# EAGLE board driver_piezo_pan (EAGLE 7.1.0)
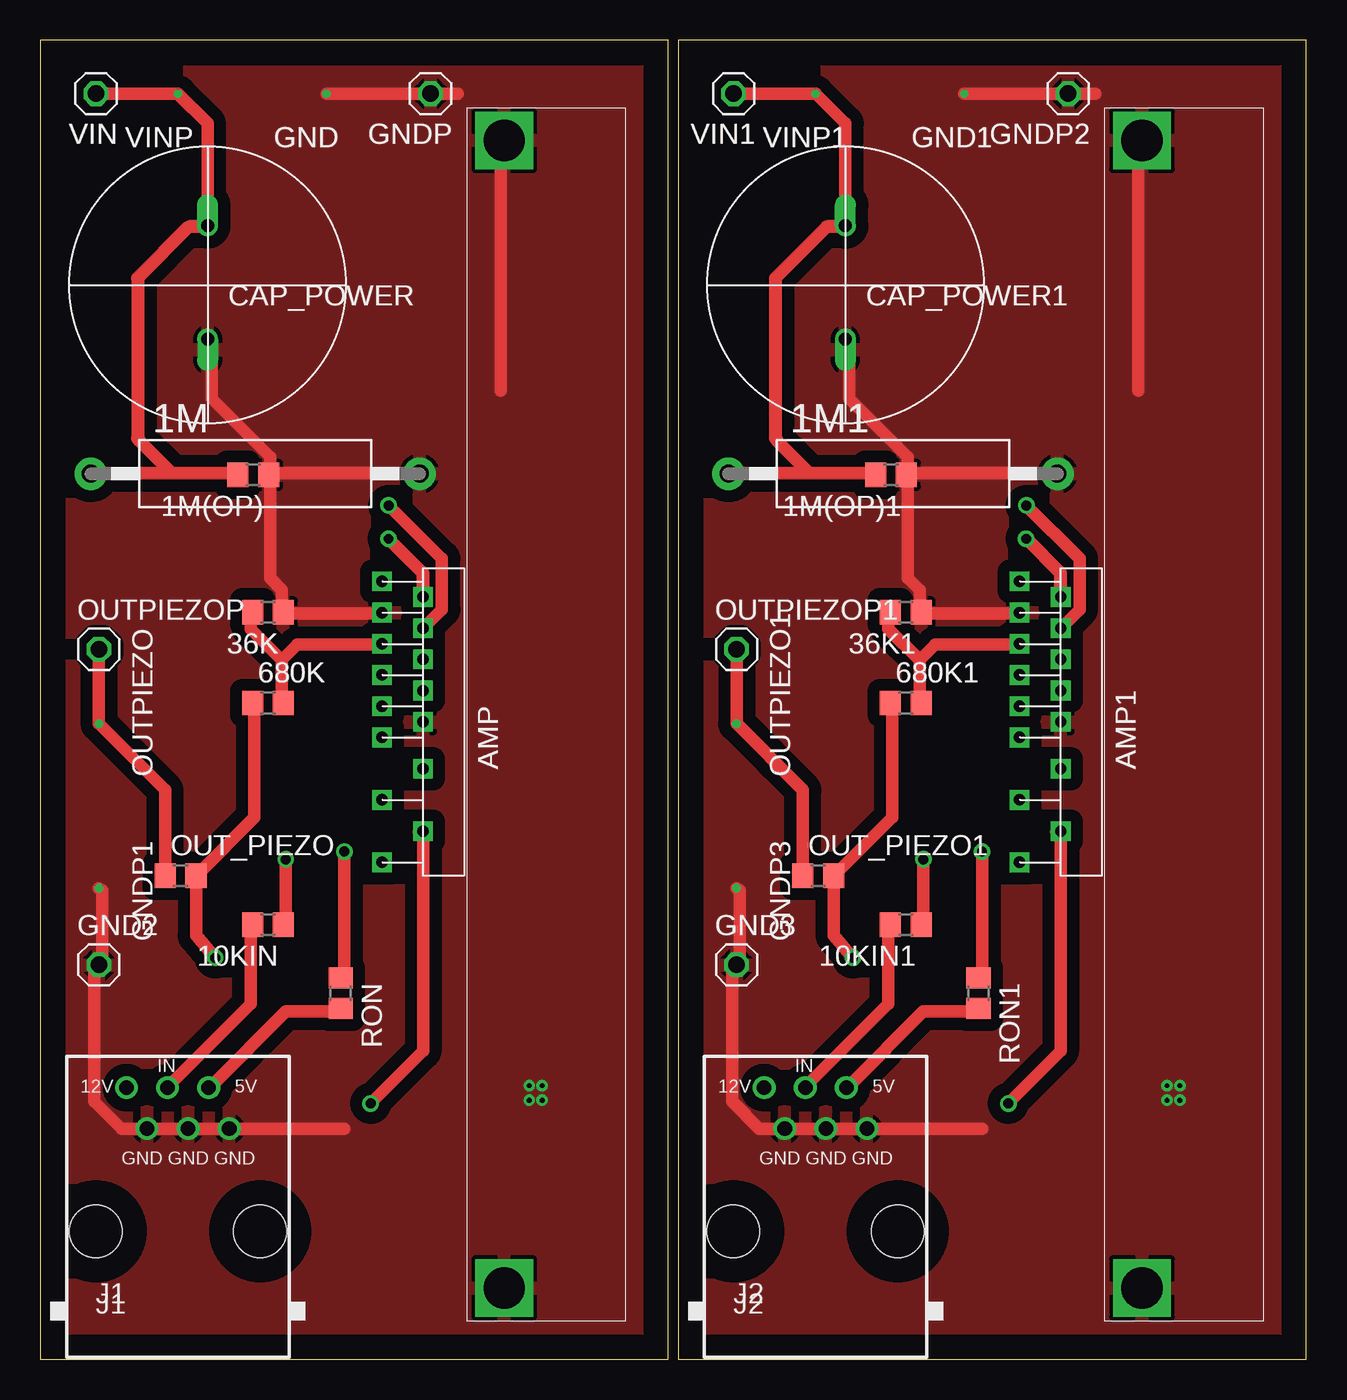
[diagram p0: board, top side]
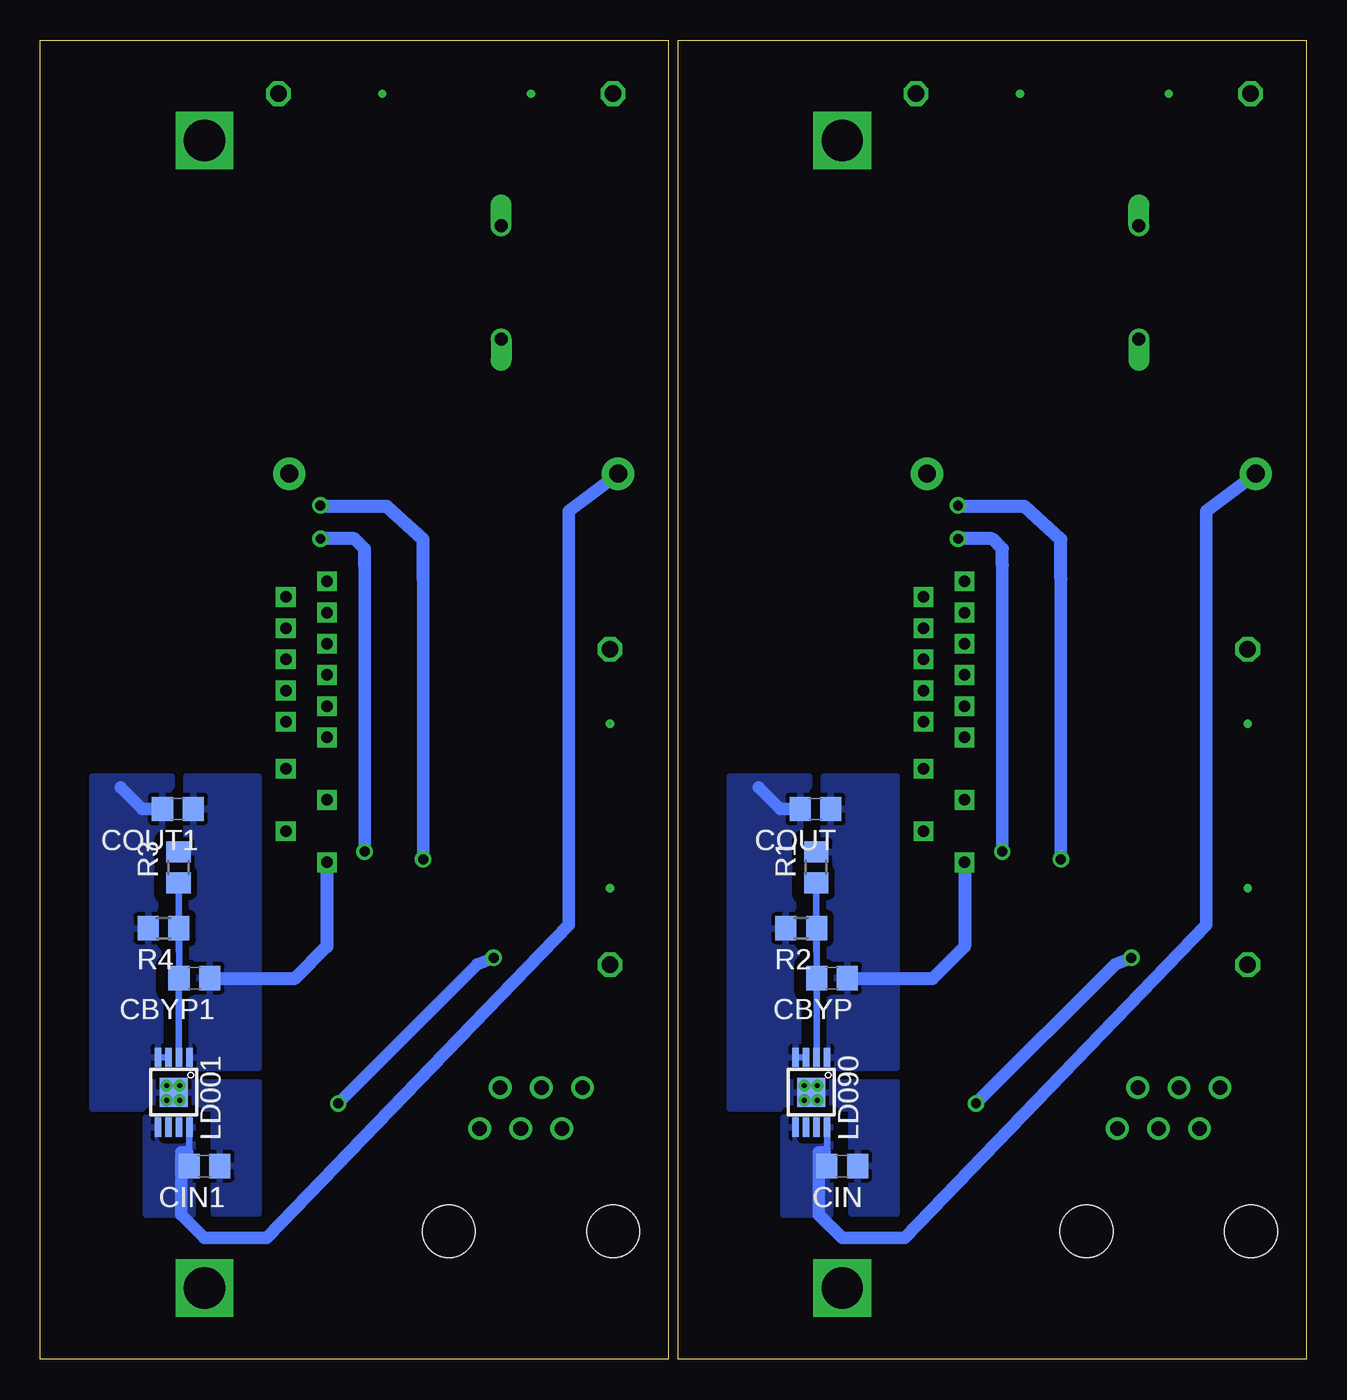
[diagram p1: board, bottom side, seen from below]

Size 78.2 x 81.5 mm. Coordinates in mm from the lower left corner, seen from the top.
Outline: 0,0 38.8,0 38.8,81.5 0,81.5 0,0
Outline: 39.4,0 78.2,0 78.2,81.5 39.4,81.5 39.4,0
Copper layers (1*16): Top 0.035mm / dielectric 1.5mm / Bottom 0.035mm
Design rules "default *": minimum track width 30mil, minimum drill 24mil, track to track 8mil, track to pad 8mil, pad to pad 8mil, via to via 8mil, smd to smd 8mil, copper to edge 60mil, drill to drill 8mil, minimum pad ring 10mil, minimum via ring 8mil, stop-mask expansion 4mil, vias tented up to drill 0mil, thermal gap 10mil
Net classes: 1 PWR: width 0.127 mm, clearance 0.406 mm; 2 GND: width 0.127 mm, clearance 0.762 mm; 3 VIN: width 0.127 mm, clearance 0.406 mm; 4 5V: width 0.406 mm, clearance 0.61 mm

## Footprints (pad centres in the part's own frame; a part is rotated, then mirrored left to right if it is on the bottom)
CA0002 = drill 1.1 pad 2: 1 -10.16,0; 2 10.16,0
R0805 = smd 1.3 x 1.5: 1 -0.95,0; 2 0.95,0
POWER_AMP_LME49811TB = drill 0.71 square: -VEE -1.351,-0.455; COMP -1.351,3.405; GND -3.891,6.3; IN+ -1.351,5.335; IN- -3.891,4.37; NC -1.351,-3.35; NC1 -3.891,-1.42; NC2 -3.891,0.51; NC3 -1.351,1.475; NC4 -3.891,2.44; NC5 -3.891,8.23; SD -1.351,7.265; SINK -3.891,-5.28; SOURCE -1.351,-7.21; VCC -3.891,-9.14
CAP200V = drill 0.8 offset: + 0,3.65; - 0,-3.35
C0805 = smd 1.3 x 1.5: 1 -0.95,0; 2 0.95,0
PAD = drill 0.003: P$1 0,0
1X01 = drill 1.016 octagon: 1 0,0
RJ12-STRAIGHT-ANALOG = drill 0.9 pad 1.4: +5V 1.905,8.89; +12V -3.175,8.89; GND1 3.175,6.35; GND2 0.635,6.35; GND3 -1.905,6.35; IN -0.635,8.89 | hole 3.251: -5.08,0; 5.08,0
S-PDSO-G08 = smd 0.4 x 1.2: 1 -0.975,-2.157; 2 -0.325,-2.157; 3 0.325,-2.157; 4 0.975,-2.157; 5 0.975,2.157; 6 0.325,2.157; 7 -0.325,2.157; 8 -0.975,2.157 | smd 1.73 x 1.78: TH 0,0
DISIPADOR = drill 2.55 square: P$1 -3.22,-34.98; P$2 -3.22,35.95

## Placement (x,y rotation side)
1M  [CA0002]  13.27,54.72 0 top
1M1  [CA0002]  52.67,54.72 0 top
1M(OP)  [R0805]  13.15,54.65 180 top
1M(OP)1  [R0805]  52.55,54.65 180 top
10KIN  [R0805]  14.06,26.85 180 top
10KIN1  [R0805]  53.46,26.85 180 top
36K  [R0805]  14.06,46.15 180 top
36K1  [R0805]  53.46,46.15 180 top
680K  [R0805]  14.06,40.55 0 top
680K1  [R0805]  53.46,40.55 0 top
AMP  POWER_AMP_LME49811TB  [POWER_AMP_LME49811TB]  24.99,39.84 0 top
AMP1  POWER_AMP_LME49811TB  [POWER_AMP_LME49811TB]  64.39,39.84 0 top
CAP_POWER  CAP200VCAP200V  [CAP200V]  10.33,66.39 0 top
CAP_POWER1  CAP200VCAP200V  [CAP200V]  49.73,66.39 0 top
CBYP  [C0805]  29.29,23.55 180 bottom
CBYP1  [C0805]  68.69,23.55 180 bottom
CIN  [C0805]  28.66,11.93 180 bottom
CIN1  [C0805]  68.06,11.93 180 bottom
COUT  [C0805]  30.31,34 180 bottom
COUT1  [C0805]  69.71,34 180 bottom
GND  PAD  [PAD]  17.68,78.21 0 top
GND1  PAD  [PAD]  57.08,78.21 0 top
GND2  [1X01]  3.61,24.37 0 top
GND3  [1X01]  43.01,24.37 0 top
GNDP  [1X01]  24.1,78.21 180 top
GNDP1  PAD  [PAD]  3.61,29.1 90 top
GNDP2  [1X01]  63.5,78.21 180 top
GNDP3  PAD  [PAD]  43.01,29.1 90 top
J1  RJ12STRAIGHT-ANALOG  [RJ12-STRAIGHT-ANALOG]  8.49,7.89 0 top
J2  RJ12STRAIGHT-ANALOG  [RJ12-STRAIGHT-ANALOG]  47.89,7.89 0 top
LD001  TPS7A4001  [S-PDSO-G08]  69.97,16.49 180 bottom
LD090  TPS7A4001  [S-PDSO-G08]  30.57,16.49 180 bottom
OUT_PIEZO  [R0805]  8.66,29.87 0 top
OUT_PIEZO1  [R0805]  48.06,29.87 0 top
OUTPIEZO  PAD  [PAD]  3.61,39.27 90 top
OUTPIEZO1  PAD  [PAD]  43.01,39.27 90 top
OUTPIEZOP  [1X01]  3.61,43.87 0 top
OUTPIEZOP1  [1X01]  43.01,43.87 0 top
R1  [R0805]  30.27,30.38 90 bottom
R2  [R0805]  31.2,26.63 180 bottom
R3  [R0805]  69.67,30.38 90 bottom
R4  [R0805]  70.6,26.63 180 bottom
RON  [R0805]  18.55,22.61 270 top
RON1  [R0805]  57.95,22.61 270 top
U$1  DISIPADOR  [DISIPADOR]  31.88,39.37 0 top
U$2  DISIPADOR  [DISIPADOR]  71.28,39.37 0 top
VIN  [1X01]  3.43,78.21 180 top
VIN1  [1X01]  42.83,78.21 180 top
VINP  PAD  [PAD]  8.49,78.21 0 top
VINP1  PAD  [PAD]  47.89,78.21 0 top

## Library data of the parts
1M 1M1 = resistor-power; OC_FARNELL: unknown; OC_NEWARK: unknown
1M(OP) 1M(OP)1 10KIN 10KIN1 36K 36K1 680K 680K1 CBYP CBYP1 CIN CIN1 COUT COUT1 OUT_PIEZO OUT_PIEZO1 R1-R4 RON RON1 = sym
AMP AMP1 CAP_POWER CAP_POWER1 GND GND1 GNDP1 GNDP3 LD001 LD090 OUTPIEZO OUTPIEZO1 U$1 U$2 VINP VINP1 = PIEZO_LBR
GND2 GND3 GNDP GNDP2 OUTPIEZOP OUTPIEZOP1 VIN VIN1 = pinhead
J1 J2 = lpatiny

## Nets
5V [5V]: J1.+5V RON.2
5V1 [5V]: J2.+5V RON1.2
B: 36K.2 680K.2 AMP.IN-
B1: 36K1.2 680K1.2 AMP1.IN-
FB: CBYP.2 LD090.2 R1.1 R2.1
FB1: CBYP1.2 LD001.2 R3.1 R4.1
GND [GND]: 1M(OP).1 1M.2 36K.1 AMP.-VEE AMP.GND CAP_POWER.- CIN.1 COUT.2 GND2.1 GND.P$1 GNDP1.P$1 GNDP.1 J1.GND1 J1.GND2 J1.GND3 LD090.3 LD090.4 LD090.TH R2.2 U$1.P$1 U$1.P$2
GND1 [GND]: 1M1.2 1M(OP)1.1 36K1.1 AMP1.-VEE AMP1.GND CAP_POWER1.- CIN1.1 COUT1.2 GND1.P$1 GND3.1 GNDP2.1 GNDP3.P$1 J2.GND1 J2.GND2 J2.GND3 LD001.3 LD001.4 LD001.TH R4.2 U$2.P$1 U$2.P$2
IN_AMP: 10KIN.1 AMP.IN+
IN_AMP1: 10KIN1.1 AMP1.IN+
IN_VOLTAGE: 10KIN.2 J1.IN
IN_VOLTAGE1: 10KIN1.2 J2.IN
ON: AMP.SD RON.1
ON1: AMP1.SD RON1.1
OUT_PIEZO: OUT_PIEZO.1 OUTPIEZO.P$1 OUTPIEZOP.1
OUT_PIEZO1: OUT_PIEZO1.1 OUTPIEZO1.P$1 OUTPIEZOP1.1
SOURCE: 680K.1 AMP.SOURCE OUT_PIEZO.2
SOURCE1: 680K1.1 AMP1.SOURCE OUT_PIEZO1.2
V1 [PWR]: AMP1.VCC CBYP1.1 COUT1.1 LD001.1 R3.2
V90 [PWR]: AMP.VCC CBYP.1 COUT.1 LD090.1 R1.2
VIN [VIN]: 1M(OP).2 1M.1 CAP_POWER.+ CIN.2 LD090.5 LD090.8 VIN.1 VINP.P$1
VIN1 [VIN]: 1M1.1 1M(OP)1.2 CAP_POWER1.+ CIN1.2 LD001.5 LD001.8 VIN1.1 VINP1.P$1

## Tracks (layer width: path | path; a pad name or v marks a point on that pad's centre or on a via)
5V
  Top 0.762: RON.2 18.53,21.48 15.15,21.48 10.57,16.89 J1.+5V
5V1
  Top 0.762: RON1.2 57.93,21.48 54.55,21.48 49.97,16.89 J2.+5V
B
  Top 0.762: 14.91,43.19 14.91,40.78 680K.2 | 14.91,43.19 12.98,45.12 12.98,46.09 36K.2 | 14.91,43.19 15.88,44.16 20.95,44.16 AMP.IN-
B1
  Top 0.762: 54.31,43.19 54.31,40.78 680K1.2 | 54.31,43.19 52.38,45.12 52.38,46.09 36K1.2 | 54.31,43.19 55.28,44.16 60.34,44.16 AMP1.IN-
FB
  Bottom 0.406: LD090.2 30.24,22.15 CBYP.2 30.24,25.23 R2.1 30.27,25.23 R1.1
FB1
  Bottom 0.406: LD001.2 69.65,22.15 CBYP1.2 69.64,25.23 R4.1 69.67,25.23 R3.1
GND  (via drill 0.3)
  Top 0.762: AMP.GND 20.95,46.09 15.15,46.09 36K.1 14.91,46.33 14.91,47.54 14.19,48.26 14.19,54.53 1M(OP).1 | CAP_POWER.- 10.57,62.98 10.57,59.36 14.19,55.74 14.19,55.02 1M(OP).1 | 1M(OP).1 14.73,54.77 23.66,54.77 1M.2 23.6,55.02 | 28.43,59.84 28.43,75.29 U$1.P$2 | GNDP1.P$1 3.81,28.96 3.81,24.37 GND2.1 3.33,24.13 3.33,15.93 5.02,14.24 6.23,14.24 J1.GND3 6.71,14.24 J1.GND2 9.36,14.24 11.54,14.24 J1.GND1 12.02,14.24 18.77,14.24 | GND.P$1 GNDP.1 25.77,78.21
  Bottom 0.406: LD090.3 LD090.4
  Bottom 0.762: 23.84,39.33 AMP.-VEE | 33.83,35.33 32.5,34 COUT.2
  other vias: 30.2,16.9 31,16.9 31,16 30.2,16
  pour Bottom: 30.7,18 30.7,36 35.6,36 35.6,18
  pour Bottom: 35.6,18 35.6,15.5 28.1,15.5 28.1,9 25.3,9 25.3,17.1 32.2,17.1 32.2,18
  pour Top: 1.4,79.8 1.4,0 37.4,0 37.4,80 1.4,80
GND1  (via drill 0.3)
  Top 0.762: AMP1.GND 60.34,46.09 54.55,46.09 36K1.1 54.31,46.33 54.31,47.54 53.59,48.26 53.59,54.53 1M(OP)1.1 | CAP_POWER1.- 49.97,62.98 49.97,59.36 53.59,55.74 53.59,55.02 1M(OP)1.1 | 1M(OP)1.1 54.13,54.77 63.06,54.77 1M1.2 63,55.02 | 67.83,59.84 67.83,75.29 U$2.P$2 | GNDP3.P$1 43.21,28.96 43.21,24.37 GND3.1 42.73,24.13 42.73,15.93 44.42,14.24 45.63,14.24 J2.GND3 46.11,14.24 J2.GND2 48.76,14.24 50.93,14.24 J2.GND1 51.42,14.24 58.17,14.24 | GND1.P$1 GNDP2.1 65.17,78.21
  Bottom 0.406: LD001.3 LD001.4
  Bottom 0.762: 63.24,39.33 AMP1.-VEE | 73.23,35.33 71.9,34 COUT1.2
  other vias: 69.6,16.9 70.4,16.9 70.4,16 69.6,16
  pour Bottom: 70.1,18 70.1,36 75,36 75,18
  pour Bottom: 75,18 75,15.5 67.5,15.5 67.5,9 64.7,9 64.7,17.1 71.6,17.1 71.6,18
  pour Top: 40.8,79.8 40.8,0 76.8,0 76.8,80 40.8,80
IN_AMP  (via drill 0.61)
  Top 0.762: v15.15,30.89 15.15,27.03 10KIN.1 | v21.51,52.76 24.81,49.47 24.81,46.33 23.84,45.36 AMP.IN+
  Bottom 0.762: 15.15,48.21 v15.15,30.89
  Bottom 0.813: 15.15,48.21 15.15,50.65 17.4,52.7 21.15,52.7 v21.51,52.76
IN_AMP1  (via drill 0.61)
  Top 0.762: v54.55,30.89 54.55,27.03 10KIN1.1 | v60.91,52.76 64.21,49.47 64.21,46.33 63.24,45.36 AMP1.IN+
  Bottom 0.762: 54.55,48.21 v54.55,30.89
  Bottom 0.813: 54.55,48.21 54.55,50.65 56.8,52.7 60.55,52.7 v60.91,52.76
IN_VOLTAGE
  Top 0.762: 10KIN.2 12.98,26.78 12.98,21.96 7.91,16.89 J1.IN
IN_VOLTAGE1
  Top 0.762: 10KIN1.2 52.38,26.78 52.38,21.96 47.31,16.89 J2.IN
ON  (via drill 0.61)
  Top 0.762: v18.77,31.37 18.77,23.65 RON.1
  Top 0.813: AMP.SD 23.64,48.56 v21.5,50.7
  Bottom 0.762: 18.77,49.07 v18.77,31.37
  Bottom 0.813: 18.77,49.07 18.77,50.07 19.4,50.7 v21.5,50.7
ON1  (via drill 0.61)
  Top 0.762: v58.17,31.37 58.17,23.65 RON1.1
  Top 0.813: AMP1.SD 63.04,48.56 v60.9,50.7
  Bottom 0.762: 58.17,49.07 v58.17,31.37
  Bottom 0.813: 58.17,49.07 58.17,50.07 58.8,50.7 v60.9,50.7
OUT_PIEZO
  Top 0.762: OUT_PIEZO.1 7.71,35.17 OUTPIEZO.P$1 OUTPIEZOP.1
OUT_PIEZO1
  Top 0.762: OUT_PIEZO1.1 47.11,35.17 OUTPIEZO1.P$1 OUTPIEZOP1.1
SOURCE  (via drill 0.61)
  Top 0.762: v20.4,15.8 23.64,19.04 AMP.SOURCE 23.36,32.58 | 680K.1 13.22,40.54 13.22,33.48 OUT_PIEZO.2 9.62,29.88 9.62,26.18 v10.8,24.8
  Bottom 0.762: v10.8,24.8 11.8,24.4 v20.4,15.8
SOURCE1  (via drill 0.61)
  Top 0.762: v59.8,15.8 63.04,19.04 AMP1.SOURCE 62.76,32.58 | 680K1.1 52.62,40.54 52.62,33.48 OUT_PIEZO1.2 49.02,29.88 49.02,26.18 v50.2,24.8
  Bottom 0.762: v50.2,24.8 51.2,24.4 v59.8,15.8
V1
  Bottom 0.813: AMP1.VCC 60.5,25.5 62.5,23.5 67.69,23.5 CBYP1.1
  pour Bottom: 69.2,18 69.2,36 64.7,36 64.7,18
V90
  Bottom 0.813: AMP.VCC 21.1,25.5 23.1,23.5 28.29,23.5 CBYP.1
  pour Bottom: 29.8,18 29.8,36 25.3,36 25.3,18
VIN
  Top 0.762: 1M(OP).2 12.02,54.77 8.1,54.77 3.33,54.77 1M.1 | 10.33,69.98 CAP_POWER.+ 10.33,76.37 VINP.P$1 VIN.1
  Top 0.813: 10.33,69.98 9.18,69.98 6,66.8 6,56.9 6.1,56.8 6.1,56.77 8.1,54.77
  Bottom 0.406: CIN.2 29.59,12.23 LD090.8
  Bottom 0.762: 29.73,12.79 30.11,12.79 30.11,8.93 28.67,7.48 24.81,7.48 6.16,26.83 6.16,52.4 3.33,54.53 1M.1
  pour Bottom: 29.4,14.9 29.4,8.9 32.3,8.9 32.3,14.9
VIN1
  Top 0.762: 1M(OP)1.2 51.42,54.77 47.5,54.77 42.73,54.77 1M1.1 | 49.73,69.98 CAP_POWER1.+ 49.73,76.37 VINP1.P$1 VIN1.1
  Top 0.813: 49.73,69.98 48.58,69.98 45.4,66.8 45.4,56.9 45.5,56.8 45.5,56.77 47.5,54.77
  Bottom 0.406: CIN1.2 69,12.23 LD001.8
  Bottom 0.762: 69.13,12.79 69.52,12.79 69.52,8.93 68.07,7.48 64.21,7.48 45.56,26.83 45.56,52.4 42.73,54.53 1M1.1
  pour Bottom: 68.8,14.9 68.8,8.9 71.7,8.9 71.7,14.9

## Text on the board
_tPlace: CAP_POWER | CAP_POWER1 | AMP | AMP1
_tNames: VIN | GNDP | VIN1 | GNDP2 | VINP | GND | VINP1 | GND1 | 1M | 1M1 | 1M(OP) | 1M(OP)1 | OUTPIEZOP | OUTPIEZOP1 | 36K | 36K1 | 680K | 680K1 | OUTPIEZO | OUTPIEZO1 | OUT_PIEZO | OUT_PIEZO1 | GND2 | GNDP1 | 10KIN | GND3 | GNDP3 | 10KIN1 | RON | RON1 | J1 | J2
_bNames: COUT | COUT1 | R1 | R3 | R2 | R4 | CBYP | CBYP1 | LD090 | LD001 | CIN | CIN1